# EAGLE board Board3 (EAGLE 6.1)
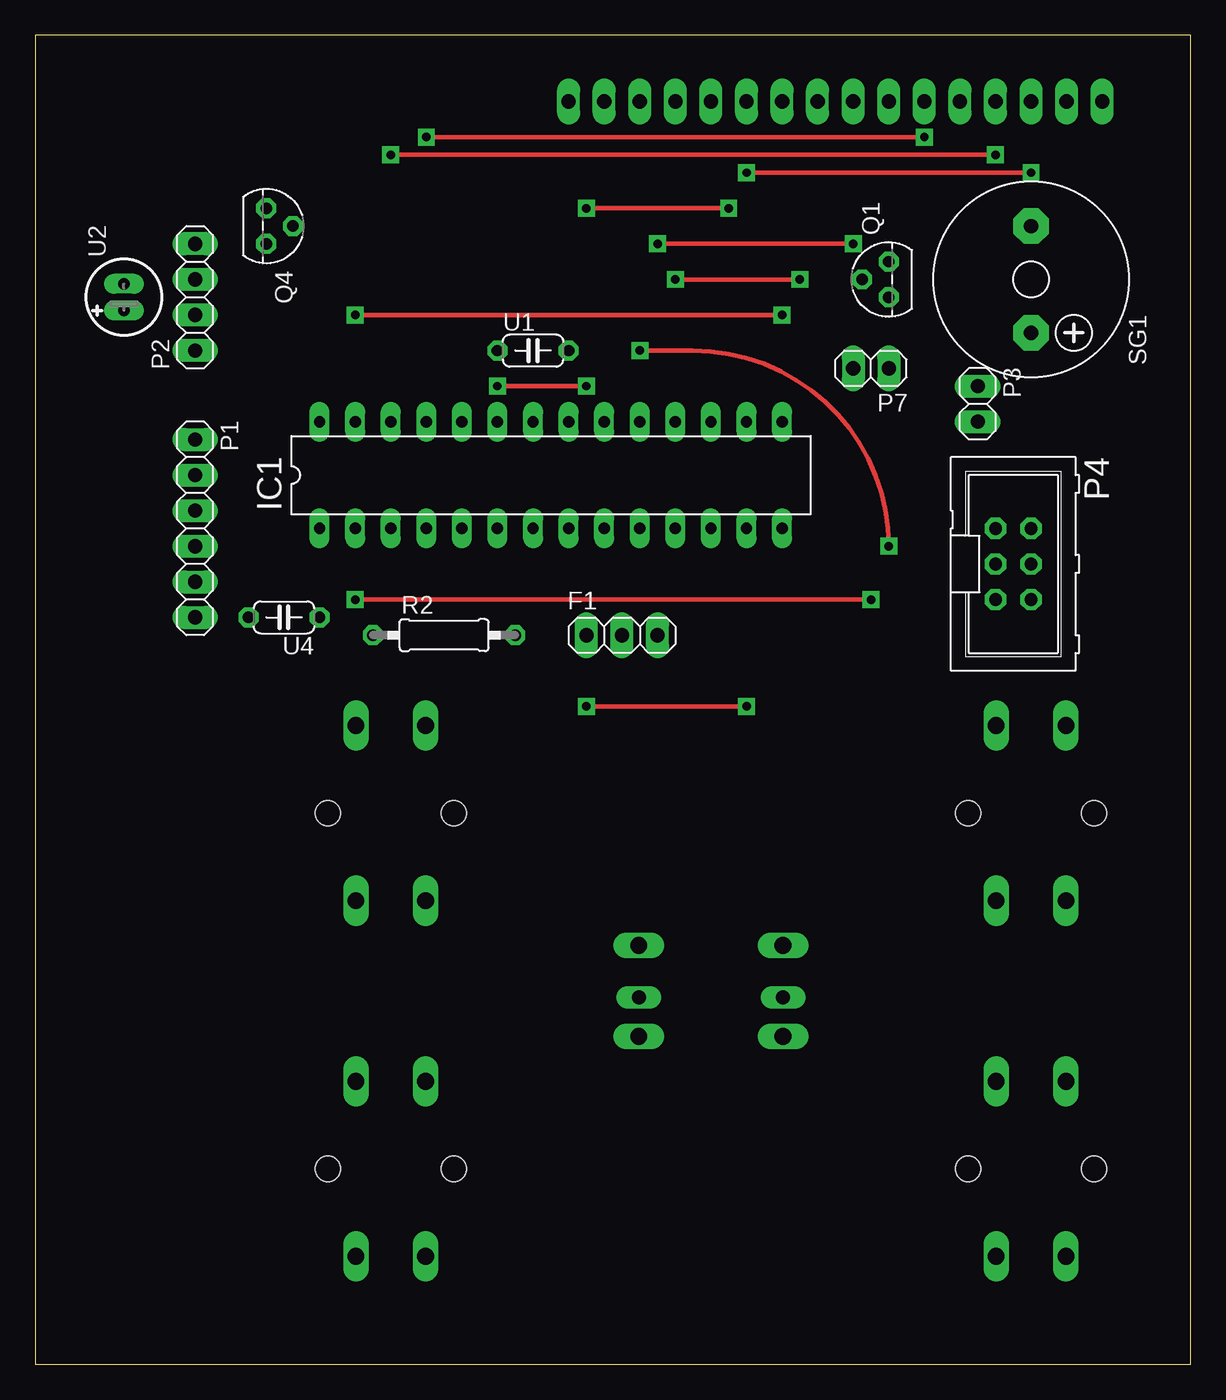
[diagram p0: board, top side]
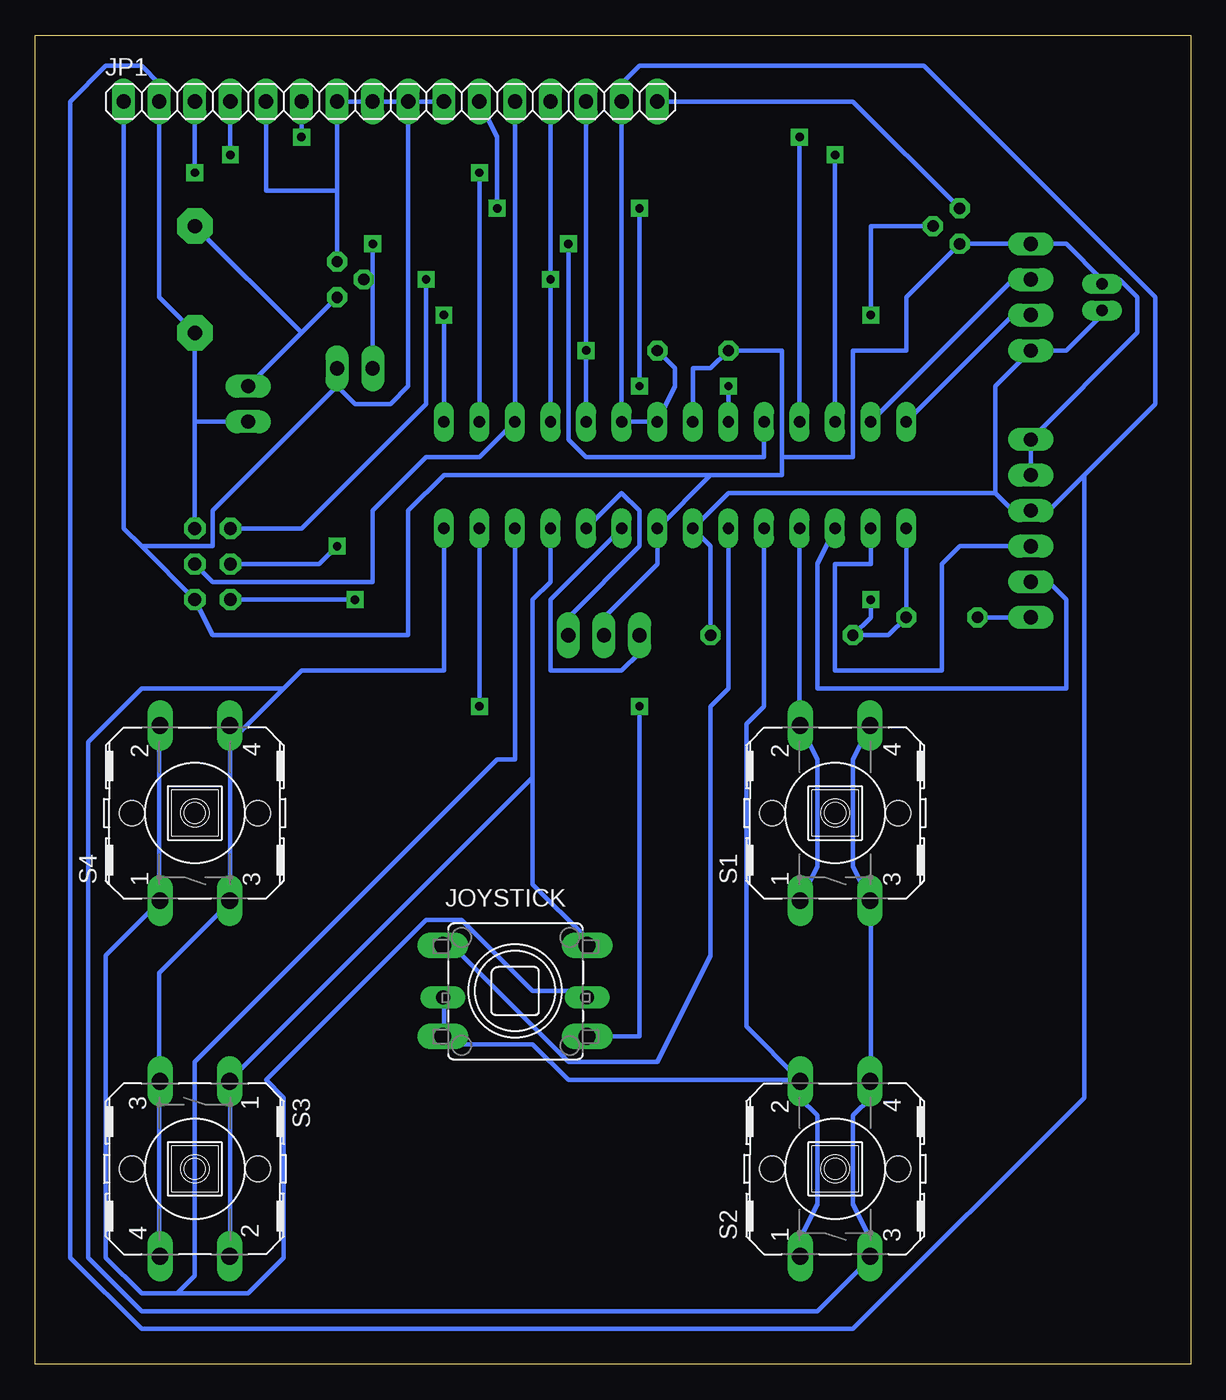
[diagram p1: board, bottom side, seen from below]

Size 82.53 x 94.92 mm. Coordinates in mm from the lower left corner, seen from the top.
Outline: 0,0 82.53,0 82.53,94.92 0,94.92 0,0
Copper layers (1*16): Top 0.035mm / dielectric 1.5mm / Bottom 0.035mm
Design rules: minimum track width 12mil, minimum drill 24mil, track to track 12mil, track to pad 12mil, pad to pad 12mil, via to via 12mil, smd to smd 8mil, copper to edge 40mil, drill to drill 8mil, minimum pad ring 12mil, minimum via ring 12mil, stop-mask expansion 4mil, vias tented up to drill 0mil, thermal gap 10mil

## Footprints (pad centres in the part's own frame; a part is rotated, then mirrored left to right if it is on the bottom)
1X03 = drill 1.016 long: 1 -2.54,0; 2 0,0; 3 2.54,0
DIL28-3 = drill 0.813 long: 1 -16.51,-3.81; 2 -13.97,-3.81; 3 -11.43,-3.81; 4 -8.89,-3.81; 5 -6.35,-3.81; 6 -3.81,-3.81; 7 -1.27,-3.81; 8 1.27,-3.81; 9 3.81,-3.81; 10 6.35,-3.81; 11 8.89,-3.81; 12 11.43,-3.81; 13 13.97,-3.81; 14 16.51,-3.81; 15 16.51,3.81; 16 13.97,3.81; 17 11.43,3.81; 18 8.89,3.81; 19 6.35,3.81; 20 3.81,3.81; 21 1.27,3.81; 22 -1.27,3.81; 23 -3.81,3.81; 24 -6.35,3.81; 25 -8.89,3.81; 26 -11.43,3.81; 27 -13.97,3.81; 28 -16.51,3.81
SKQU = drill 1.2 long: CENTER 5.15,3.25; COMMON 5.15,-3.25; DOWN -5.15,-3.25; UP -5.15,3.25 | drill 1 long: LEFT -5.15,-0.45; RIGHT 5.15,-0.45
1X16 = drill 1.016 long: 1 -19.05,0; 2 -16.51,0; 3 -13.97,0; 4 -11.43,0; 5 -8.89,0; 6 -6.35,0; 7 -3.81,0; 8 -1.27,0; 9 1.27,0; 10 3.81,0; 11 6.35,0; 12 8.89,0; 13 11.43,0; 14 13.97,0; 15 16.51,0; 16 19.05,0
1X06 = drill 1.016 long: 1 -6.35,0; 2 -3.81,0; 3 -1.27,0; 4 1.27,0; 5 3.81,0; 6 6.35,0
1X04 = drill 1.016 long: 1 -3.81,0; 2 -1.27,0; 3 1.27,0; 4 3.81,0
1X02 = drill 1.016 long: 1 -1.27,0; 2 1.27,0
ML6 = drill 0.914 octagon: 1 -2.54,-1.27; 2 -2.54,1.27; 3 0,-1.27; 4 0,1.27; 5 2.54,-1.27; 6 2.54,1.27
TO92 = drill 0.813 octagon: 1 1.27,0; 2 0,1.905; 3 -1.27,0
0207/10 = drill 0.813 octagon: 1 -5.08,0; 2 5.08,0
B3F-40XX = drill 1.194 long: 1 -6.248,2.489; 2 6.248,2.489; 3 -6.248,-2.489; 4 6.248,-2.489 | hole 1.803: 0,-4.496; 0,4.496
F/CM12P = drill 1.016 pad 2.54 octagon: + 3.81,0; - -3.81,0
C050-024X044 = drill 0.813 octagon: 1 -2.54,0; 2 2.54,0
E-020X050 = drill 0.813 long: + -0.953,0; - 0.953,0

## Placement (x,y rotation side)
F1  [1X03]  41.91,52.07 0 top
IC1  MEGA8-P  [DIL28-3]  36.83,63.5 0 top
JOYSTICK  SKQUAAA010  [SKQU]  48.26,26.67 0 bottom
JP1  HD47780  [1X16]  57.15,90.17 0 bottom
P1  Serial  [1X06]  11.43,59.69 270 top
P2  I2C  [1X04]  11.43,76.2 90 top
P3  Buzzer  [1X02]  67.31,68.58 270 top
P4  ISP_WANNENBUCHSE  [ML6]  69.85,57.15 270 top
P7  Test  [1X02]  59.69,71.12 180 top
Q1  BSS101  [TO92]  60.96,77.47 90 top
Q4  BSS101  [TO92]  16.51,81.28 270 top
R2  10k  [0207/10]  29.21,52.07 0 top
S1  Up  [B3F-40XX]  25.4,39.37 90 bottom
S2  Down  [B3F-40XX]  25.4,13.97 90 bottom
S3  Enter  [B3F-40XX]  71.12,13.97 270 bottom
S4  Cancel  [B3F-40XX]  71.12,39.37 90 bottom
SG1  F/CM12P  [F/CM12P]  71.12,77.47 270 top
U1  100nF  [C050-024X044]  35.56,72.39 0 top
U2  100uF  [E-020X050]  6.35,76.2 90 top
U4  100nF  [C050-024X044]  17.78,53.34 180 top

## Library data of the parts
F1 JP1 P1-P3 P7 = pinhead
IC1 = atmel; OC_FARNELL: unknown; OC_NEWARK: unknown
JOYSTICK = gamaral; MF: ALPS; OC_MOUSER: 688-SKQUAA; OC_NEWARK: 59M1981
P4 = supa
Q1 Q4 = transistor-fet
R2 U1 U4 = resistor
S1-S4 = switch-omron
SG1 = buzzer; OC_FARNELL: unknown; OC_NEWARK: unknown
U2 = cap-master

## Nets
5V: IC1.7 IC1.20 IC1.21 JP1.2 JP1.15 P1.3 P2.1 P3.2 P4.2 R2.2 SG1.+ U1.2 U2.+
B_COMMON: IC1.14 S1.3 S1.4 S2.3 S2.4 S3.3 S3.4 S4.3 S4.4
B_DOWN: IC1.5 JOYSTICK.DOWN JOYSTICK.LEFT S2.1 S2.2
B_ENTER: IC1.11 JOYSTICK.CENTER S3.1 S3.2
B_ESC: IC1.12 JOYSTICK.RIGHT S4.1 S4.2
B_UP: IC1.4 S1.1 S1.2
BUZZER: IC1.24 P7.2 Q1.2
GND: F1.2 IC1.8 IC1.22 JP1.1 JP1.5 JP1.7 JP1.8 JP1.9 JP1.10 P1.1 P1.2 P2.4 P4.6 P7.1 Q1.1 Q4.1 U1.1 U2.-
J_COMMON: IC1.13 JOYSTICK.COMMON
J_UP: IC1.6 JOYSTICK.UP
LCD_BACKLIGHT: IC1.15 Q4.2
LCD_CONTRAST: IC1.16 JP1.3
LCD_DB4: IC1.23 JP1.11
LCD_DB5: IC1.17 JP1.12 P4.4
LCD_DB6: IC1.18 JP1.13 P4.1
LCD_DB7: IC1.19 JP1.14 P4.3
LCD_E: IC1.25 JP1.6
LCD_RS: IC1.26 JP1.4
N$2: JP1.16 Q4.3
N$4: P3.1 Q1.3 SG1.-
OSC1: F1.1 IC1.9
OSC2: F1.3 IC1.10
RESET: IC1.1 P4.5 R2.1 U4.1
RTS: P1.6 U4.2
RXD: IC1.2 P1.4
SCL: IC1.28 P2.2
SDA: IC1.27 P2.3
TXD: IC1.3 P1.5

## Tracks (layer width: path | path; a pad name or v marks a point on that pad's centre or on a via)
5V
  Bottom 0.305: 71.12,67.31 SG1.+ 73.66,76.2 JP1.2 73.66,91.44 74.93,92.71 77.47,92.71 80.01,90.17 80.01,7.62 74.93,2.54 24.13,2.54 7.62,19.05 7.62,63.5 | 71.12,67.31 P4.2 | 71.12,67.31 P3.2 | U2.+ 6.35,74.93 8.89,72.39 P2.1 13.97,69.85 13.97,62.23 | 13.97,62.23 12.7,60.96 P1.3 10.16,60.96 7.62,63.5 | 13.97,62.23 33.02,62.23 IC1.7 34.29,58.42 R2.2 | 7.62,63.5 2.54,68.58 2.54,76.2 19.05,92.71 39.37,92.71 40.64,91.44 JP1.15 IC1.20 IC1.21 36.83,69.85 36.83,71.12 U1.2
B_COMMON
  Bottom 0.305: S1.4 24.13,43.18 24.13,35.56 S1.3 22.86,33.02 22.86,20.32 S2.4 22.86,19.05 24.13,17.78 24.13,11.43 22.86,8.89 S2.3 22.86,7.62 26.67,3.81 74.93,3.81 78.74,7.62 78.74,44.45 74.93,48.26 64.77,48.26 | S3.4 73.66,8.89 73.66,19.05 S3.3 73.66,20.32 73.66,27.94 68.58,33.02 S4.3 68.58,34.29 68.58,44.45 | 68.58,44.45 64.77,48.26 | 64.77,48.26 63.5,49.53 53.34,49.53 IC1.14 | 68.58,44.45 S4.4
B_DOWN
  Bottom 0.305: JOYSTICK.LEFT 53.34,26.67 53.34,24.13 JOYSTICK.DOWN 53.34,22.86 46.99,22.86 44.45,20.32 27.94,20.32 | IC1.5 30.48,46.99 31.75,45.72 31.75,24.13 27.94,20.32 | S2.1 27.94,8.89 26.67,11.43 26.67,17.78 27.94,19.05 S2.2 27.94,20.32
B_ENTER
  Bottom 0.305: S3.2 68.58,8.89 68.58,19.05 S3.1 68.58,20.32 46.99,41.91 | IC1.11 45.72,55.88 46.99,54.61 46.99,41.91 | 46.99,41.91 46.99,34.29 43.18,30.48 JOYSTICK.CENTER
B_ESC
  Bottom 0.305: IC1.12 48.26,43.18 49.53,43.18 71.12,21.59 71.12,6.35 72.39,5.08 | 72.39,5.08 74.93,5.08 77.47,7.62 77.47,29.21 73.66,33.02 S4.1 73.66,34.29 73.66,44.45 S4.2 | 72.39,5.08 67.31,5.08 64.77,7.62 64.77,19.05 66.04,20.32 54.61,31.75 52.07,31.75 46.99,26.67 43.18,26.67 JOYSTICK.RIGHT
B_UP
  Bottom 0.305: IC1.4 27.94,45.72 S1.2 26.67,43.18 26.67,35.56 S1.1
BUZZER  (via drill 0.6)
  Top 0.305: v44.45,80.01 v58.42,80.01
  Bottom 0.305: IC1.24 30.48,64.77 43.18,64.77 44.45,66.04 v44.45,80.01 | 58.42,77.47 P7.2 | 58.42,77.47 Q1.2 | v58.42,80.01 58.42,77.47
GND
  Bottom 0.305: 60.96,83.82 JP1.7 JP1.8 JP1.9 | 60.96,83.82 Q1.1 | JP1.5 66.04,83.82 60.96,83.82 | 60.96,69.85 59.69,68.58 57.15,68.58 55.88,69.85 JP1.9 | JP1.9 JP1.10 | 74.93,58.42 76.2,59.69 JP1.1 | 74.93,58.42 P4.6 69.85,52.07 55.88,52.07 55.88,60.96 53.34,63.5 34.29,63.5 | 60.96,69.85 69.85,60.96 69.85,58.42 74.93,58.42 | 60.96,69.85 P7.1 | F1.2 41.91,53.34 38.1,57.15 IC1.8 34.29,63.5 | P1.2 P1.1 3.81,73.66 3.81,76.2 5.08,77.47 6.35,77.47 | 6.35,77.47 8.89,80.01 P2.4 Q4.1 20.32,76.2 20.32,72.39 24.13,72.39 24.13,64.77 29.21,64.77 | 6.35,77.47 U2.- | 34.29,63.5 29.21,63.5 29.21,64.77 | 29.21,64.77 29.21,72.39 U1.1 34.29,71.12 35.56,71.12 IC1.22
J_COMMON  (via drill 0.6)
  Top 0.305: v39.37,46.99 v50.8,46.99
  Bottom 0.305: JOYSTICK.COMMON 39.37,23.42 v39.37,46.99 | IC1.13 v50.8,46.99
J_UP
  Bottom 0.305: IC1.6 33.02,48.26 34.29,46.99 34.29,29.21 38.1,21.59 44.45,21.59 53.34,30.48 JOYSTICK.UP
LCD_BACKLIGHT  (via drill 0.6)
  Top 0.305: v53.34,74.93 v22.86,74.93
  Bottom 0.305: IC1.15 v53.34,74.93 | v22.86,74.93 22.86,81.28 Q4.2
LCD_CONTRAST  (via drill 0.6)
  Top 0.305: v71.12,85.09 v50.8,85.09
  Bottom 0.305: JP1.3 v71.12,85.09 | v50.8,85.09 IC1.16
LCD_DB4  (via drill 0.6)
  Top 0.305: v49.53,82.55 v39.37,82.55 | v39.37,69.85 v33.02,69.85
  Bottom 0.305: JP1.11 49.53,87.63 v49.53,82.55 | v39.37,82.55 v39.37,69.85 | v33.02,69.85 IC1.23
LCD_DB5
  Bottom 0.305: P4.4 69.85,55.88 58.42,55.88 58.42,60.96 54.61,64.77 50.8,64.77 IC1.17 JP1.12
LCD_DB6  (via drill 0.6)
  Top 0.305: v54.61,77.47 v45.72,77.47
  Bottom 0.305: JP1.13 v45.72,77.47 IC1.18 | P4.1 63.5,59.69 54.61,68.58 v54.61,77.47
LCD_DB7  (via drill 0.6)
  Top 0.305: v60.96,58.42 arc90 46.99,72.39 v43.18,72.39
  Bottom 0.305: JP1.14 v43.18,72.39 IC1.19 | P4.3 62.23,57.15 v60.96,58.42
LCD_E  (via drill 0.6)
  Top 0.305: v63.5,87.63 v27.94,87.63
  Bottom 0.305: JP1.6 v63.5,87.63 | v27.94,87.63 IC1.25
LCD_RS  (via drill 0.6)
  Top 0.305: v25.4,86.36 v68.58,86.36
  Bottom 0.305: IC1.26 v25.4,86.36 | v68.58,86.36 JP1.4
N$2
  Bottom 0.305: Q4.3 24.13,90.17 JP1.16
N$4
  Bottom 0.305: P3.1 63.5,73.66 | 63.5,73.66 Q1.3 | 63.5,73.66 SG1.-
OSC1
  Bottom 0.305: IC1.9 45.72,54.61 45.72,49.53 40.64,49.53 39.37,50.8 F1.1
OSC2
  Bottom 0.305: IC1.10 40.64,62.23 39.37,60.96 39.37,58.42 44.45,53.34 F1.3
RESET  (via drill 0.6)
  Top 0.305: v59.69,54.61 v22.86,54.61
  Bottom 0.305: IC1.1 U4.1 21.59,52.07 R2.1 22.86,53.34 v22.86,54.61 | P4.5 v59.69,54.61
RTS
  Bottom 0.305: P1.6 U4.2
RXD
  Bottom 0.305: IC1.2 22.86,57.15 25.4,57.15 25.4,49.53 17.78,49.53 17.78,57.15 16.51,58.42 P1.4
SCL
  Bottom 0.305: IC1.28 12.7,74.93 P2.2
SDA
  Bottom 0.305: IC1.27 12.7,77.47 P2.3
TXD
  Bottom 0.305: IC1.3 26.67,57.15 26.67,48.26 8.89,48.26 8.89,54.61 10.16,55.88 P1.5